# Altium PCB PCB2.PcbDoc
Units mil, origin at the board's own origin, x right, y up, seen from the top; angles counter-clockwise.
Board outline 2790.03 x 2725.03 mil, 2 copper layers (Top Layer, Bottom Layer); 12 components, 11 nets, 61 pads, 0 vias.
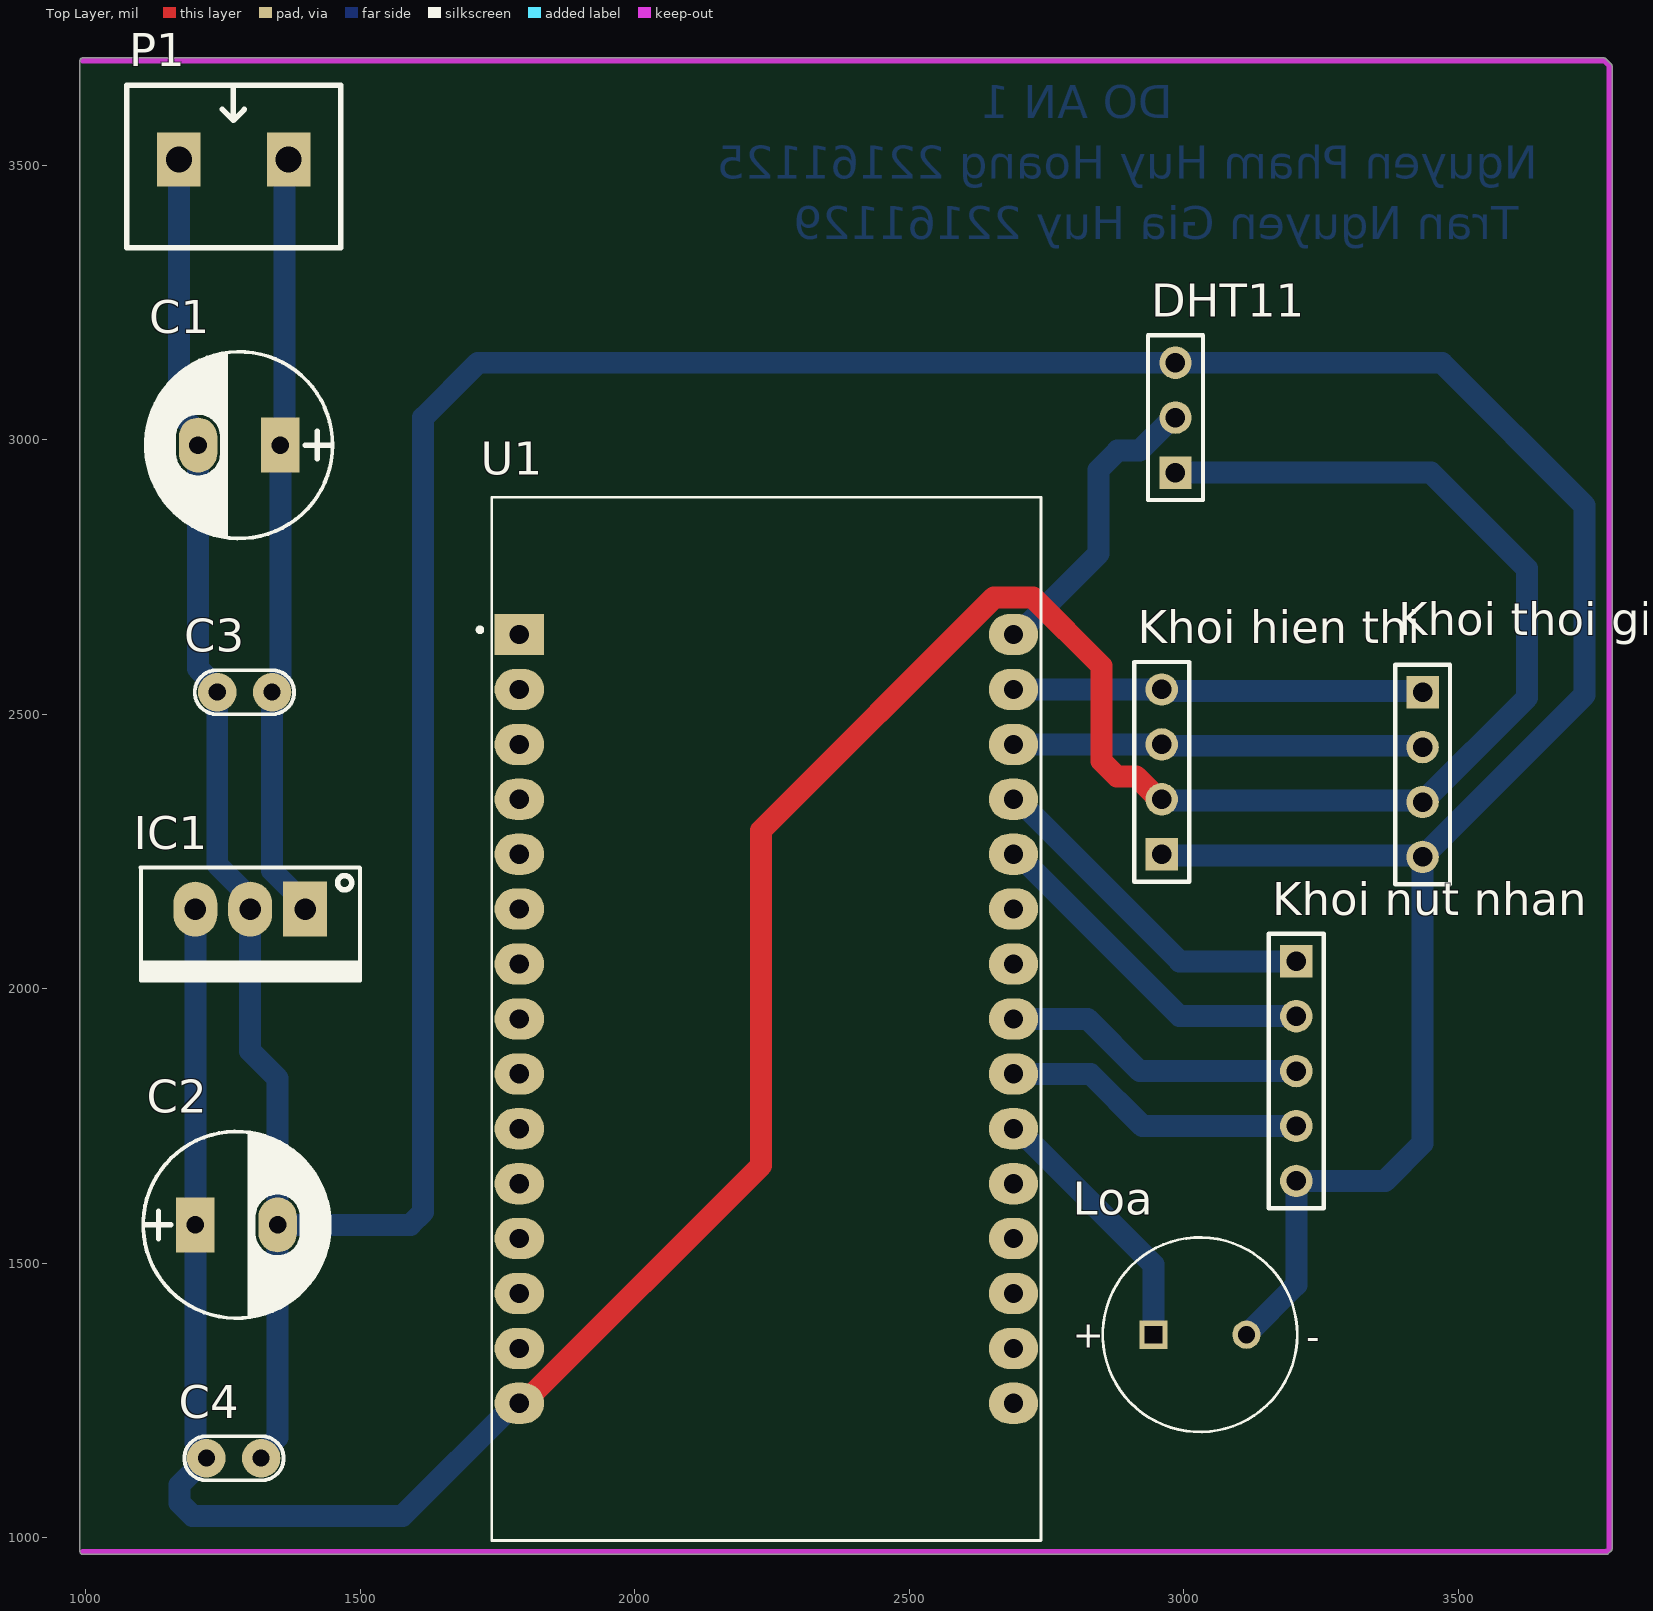
[diagram p0: Top Layer view]
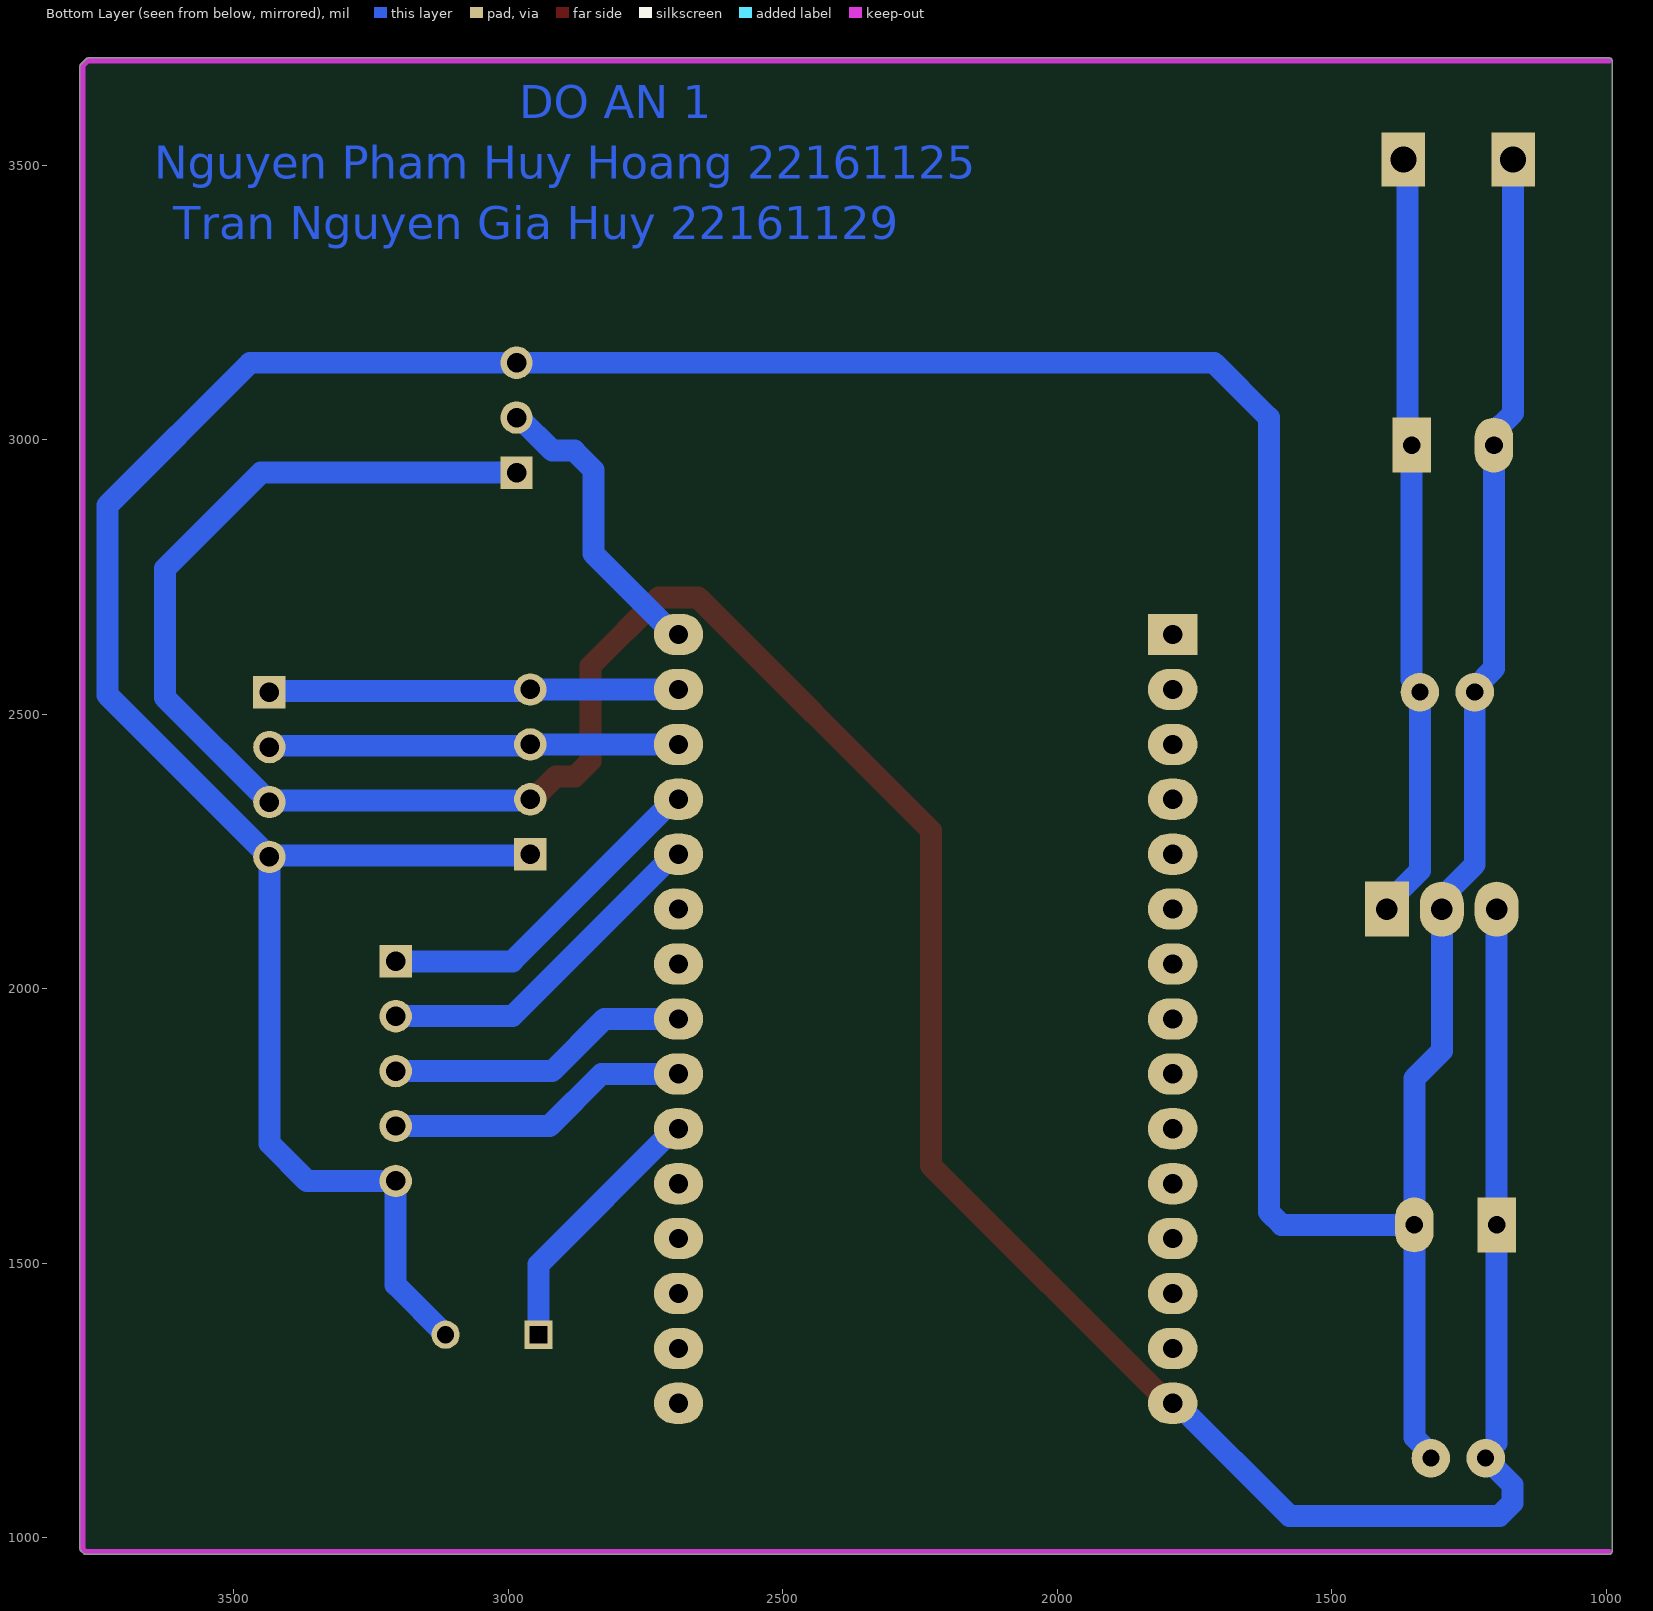
[diagram p1: Bottom Layer view, seen from below]
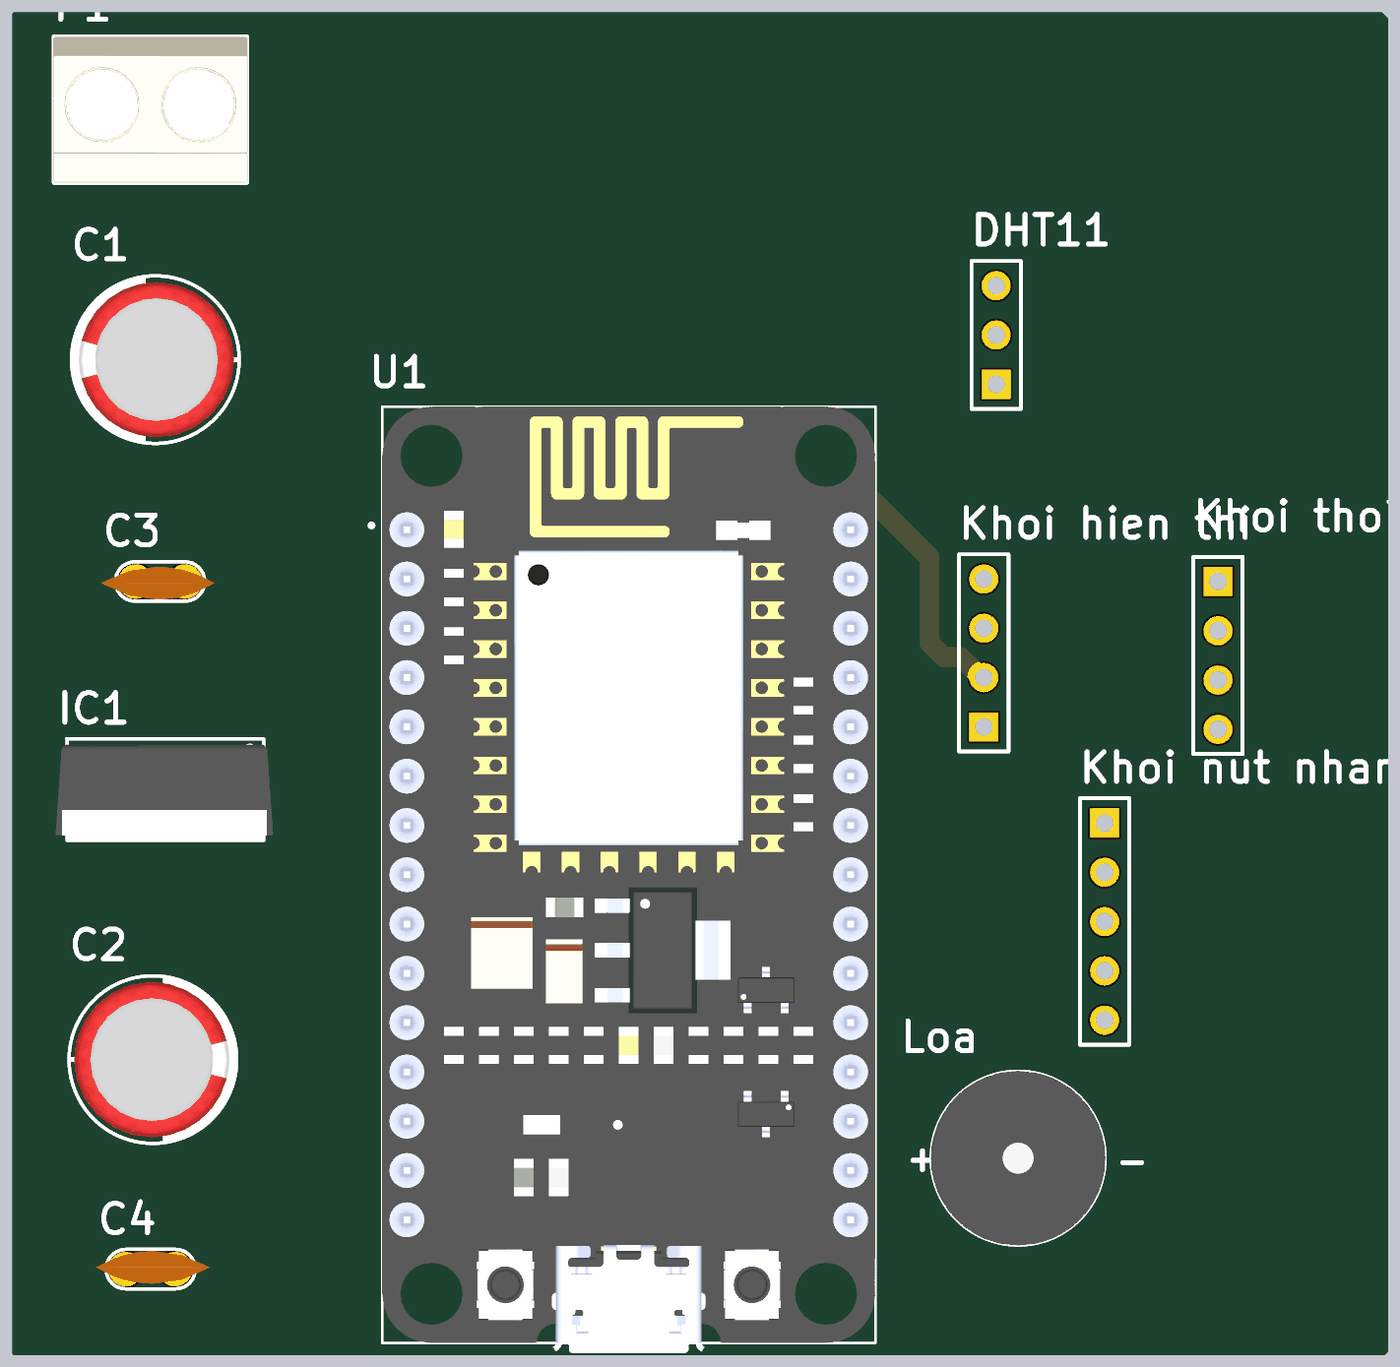
[diagram p2: 3D render of the assembled board from above, using the file's embedded part models]

## Layer stack, top to bottom
Top Solder: solder mask 0.4, Solder Resist, Dk 3.5
Top Layer: signal copper 1.4
Dielectric 1: dielectric 12.6, FR-4, Dk 4.8
Bottom Layer: signal copper 1.4
Bottom Solder: solder mask 0.4, Solder Resist, Dk 3.5

## Board outline
989.99,975 989.99,3690 cw(c995,3690) 995,3695.01 3765,3695.01 cw(c3765,3690) 3768.56,3693.53 3778.55,3683.55 cw(c3775.03,3680.01) 3780.01,3680 3780.01,980 cw(c3775,980) 3778.53,976.44 3773.55,971.45 cw(c3770.01,974.97) 3770,969.99 995,969.99 cw(c995,975)

## Design rules (kind name [scope] priority, off if disabled: settings)
Clearance [All] p1: gap=10 ignorepadtopadclearanceinfootprint=FALSE except(0: Arc-Hole Track-Hole SMDPad-Hole THPad-Hole Via-Hole Fill-Hole Poly-Hole Region-Hole Text-Hole)
PolygonConnect [All] p1: connectstyle=Relief reliefconductorwidth=10 reliefentries=4 polygonreliefangle="90 Angle" airgapwidth=10
RoutingVias [All] p1: holewidth=28 width=50 viastyle="Through Hole" minholewidth=28 minwidth=50 maxholewidth=28 maxwidth=50
SolderMaskExpansion [All] p1: expansion=4 istentingtop=FALSE
Width [All] p1: maxlimit=100 minlimit=10 preferedwidth=10
30 further rules are at their usual default settings.

## Components (designator, comment, footprint, x,y, rotation, side; value= is the part's Value field where it differs from the comment)
C1 "100uF/25V" CP1.5/3.4 1355,2990 r180 top value=100uF/35V/50V
C2 "47uF/16V" CP1.5/3.4 1200,1570 r0 top value=100uF/35V/50V
C3 "104" CN1 1340,2540 r180 top value=100pF
C4 "104" CN1 1220,1145 r0 top value=100pF
DHT11 "Header 3" HDR1X3 2985,2940 r90 top
IC1 "LM7805" QTO-220 1400,2145 r180 top
"Khoi hien thi" "Header 4" HDR1X4 2960,2245 r90 top
"Khoi nut nhan" "Header 5" HDR1X5 3205,2050 r270 top
"Khoi thoi gian thuc" "Header 4" HDR1X4 3435,2540 r270 top
Loa "Buzzer" Buzzer-9MM 3029.65,1370 r0 top
P1 "Header 2 - M" "Medium - Header 2" 1270,3510 r0 top
U1 "ESP8266-DevKit" ESP8266-DEVKIT 2240,1945 r0 top

## Footprints (in the part's own frame and the unit in brackets; to place one, negate y for a bottom-side part, rotate by r counter-clockwise, add the part's x,y. Pads: shape width x height; smd on the part's side, far side on the other; paste and mask are expansions set on the pad)
Buzzer-9MM [mm] "9MM"
  rect 1.308x1.308 hole 0.8 square: 1(-2.15,0)
  round 1.308 hole 0.8: 2(2.15,0)
  silkscreen extent -4.5,-4.5 4.5,4.5, body extent -4.5,-4.5 4.5,4.5, height 4.5
CN1 [mil]
  round 70 hole 31: 1(0,0) 2(100,0)
  silkscreen extent -40,-40 141,40, body extent -60,-30 170,37, height 265
CP1.5/3.4 [mil] "Tu hoa 220->470uF,16V, 470uF/16V,25V"
  rect 70x100 hole 32: 1(0,0)
  oval 70x100 hole 32: 2(150,0)
  silkscreen extent -95,-170 245,170, body extent -85,-157 230,157, height 446
ESP8266-DEVKIT [mil]
  rect 90x75 hole 35: 1(-450,700)
  oval 90x75 hole 35: 2(-450,600) 3(-450,500) 4(-450,400) 5(-450,300) 6(-450,200) 7(-450,100) 8(-450,0) 9(-450,-100) 10(-450,-200) 11(-450,-300) 12(-450,-400) 13(-450,-500) 14(-450,-600) 15(-450,-700) 16(450,-700) 17(450,-600) 18(450,-500) 19(450,-400) 20(450,-300) 21(450,-200) 22(450,-100) 23(450,0) 24(450,100) 25(450,200) 26(450,300) 27(450,400) 28(450,500) 29(450,600) 30(450,700)
  silkscreen extent -526,-950 500,950, body extent -500,-970 500,950, height 276
HDR1X3 [mm] "Connector; Header; 3 Position"
  rect 1.5x1.5 hole 0.9: 1(0,0)
  round 1.5 hole 0.9: 2(2.54,0) 3(5.08,0)
  silkscreen extent -1.27,-1.27 6.35,1.27, body extent -1.27,-1.27 6.35,1.27, height 7
HDR1X4 [mm] "Connector; Header; 4 Position"
  rect 1.5x1.5 hole 0.9: 1(0,0)
  round 1.5 hole 0.9: 2(2.54,0) 3(5.08,0) 4(7.62,0)
  silkscreen extent -1.27,-1.27 8.89,1.27, body extent -1.27,-1.27 8.89,1.27, height 7
HDR1X5 [mm] "Connector; Header; 5 Position"
  rect 1.5x1.5 hole 0.9: 1(0,0)
  round 1.5 hole 0.9: 2(2.54,0) 3(5.08,0) 4(7.62,0) 5(10.16,0)
  silkscreen extent -1.27,-1.27 11.43,1.27, body extent -1.27,-1.27 11.43,1.27, height 7
"Medium - Header 2" [mm]
  rect 2x2.5 hole 1.2: 1(-2.54,0) 2(2.54,0)
  silkscreen extent -4.95,-4.08 4.95,3.43, body extent -5,-4.07 5,3.43, height 10
QTO-220 [mil] "TO-220 - 1-2-3"
  rect 80x100 hole 39: 1(0,0)
  oval 80x100 hole 39: 2(100,0) 3(200,0)
  silkscreen extent -100,-76 300,130, body extent -119,-64 322,121, height 755

## Part data
C1 C2: library part CP3, "Cap 100uF/35V - 470uF/16V", Description 1="1000uF/6,3V - 470uF/16V - 330uF - 25V", Description 2="220uF/35V - 100uF/50V - 63V - 4,7uF/200V", Description 3="22uF => 33uF100V - 3,3uF => 4,7uF/250V", Description 4="2,2uF =>3,3uF/350 - 2,2uF/400V - 1uF/450V"
C3 C4: library part CN1, "Cap np  1pF - 472pF"
DHT11: "Header, 3-Pin", LatestRevisionDate=17-Jul-2002, LatestRevisionNote="Re-released for DXP Platform.", Publisher="Altium Limited"
IC1: library part LM78xx, "On ap +, from + 5 to + 24VDC"
"Khoi hien thi" "Khoi thoi gian thuc": "Header, 4-Pin", LatestRevisionDate=17-Jul-2002, LatestRevisionNote="Re-released for DXP Platform.", Publisher="Altium Limited"
"Khoi nut nhan": "Header, 5-Pin", LatestRevisionDate=17-Jul-2002, LatestRevisionNote="Re-released for DXP Platform.", Publisher="Altium Limited"
Loa: Package=None, Availability=Unavailable, MP=CST-951AP, Price=None
P1: "Header, 2-Pin, Medium", LatestRevisionDate=17-Jul-2002, LatestRevisionNote="Re-released for DXP Platform.", Publisher="Altium Limited"
U1: "NodeMcu Lua ESP8266 WIFI Internet of Things Network Development Module Board", Package=None, Availability="Not in stock", Check_prices=https://www.snapeda.com/parts/ZC563900/YKS/view-part/?ref=eda, MF=YKS, MP=ZC563900, Price=None, SnapEDA_Link=https://www.snapeda.com/parts/ZC563900/YKS/view-part/?ref=snap

## Nets (pads, with @x,y where several pads share a name; then routed paths per layer and width w, separated by ;. In a path a pad name is that pad's centre, name@x,y a point inside that pad or via, vN(x,y) a via of type N, cw(c..) or ccw(c..) an arc to the next point about the centre after c; other vN are vias at no path point)
+5: "Khoi hien thi.2" "Khoi thoi gian thuc.3" C2.1 C4.1 DHT11.1 IC1.3 U1.15 | length 5905.2
  Top Layer w40: U1.15 1797.5,1245 2230.6,1678.1 2230.6,2288.56 2654.54,2712.5 2725.46,2712.5 2850,2587.96 2850,2415 2878.28,2386.72 2913.13,2386.72 2954.84,2345 2960,2345
  Bottom Layer w40: IC1.3 C2.1 1200,1173.12 1220,1153.12 C4.1 1171.57,1096.57 1171.57,1063.43 1195,1040 1577.5,1040 1782.5,1245 U1.15 ; 2960,2345 2962.5,2342.5 3432.5,2342.5 3435,2340 3625,2530 3625,2765 3450,2940 DHT11.1
+12: C1.1 C3.1 IC1.1 P1.2 | length 1372.9
  Bottom Layer w40: C3.1 1340,2215 1400,2155 IC1.1 ; C3.1@1355,2563.12 C1.1 1362.5,2997.5 1362.5,3502.5 P1.2
Buzzer: Loa.1 U1.21 | length 485
  Bottom Layer w40: U1.21 2697.5,1745 2945,1497.5 Loa.1
Dat_bao_thuc: "Khoi nut nhan.3" U1.23 | length 554.4
  Bottom Layer w40: U1.23 2825,1945 2920,1850 3205,1850
DHT11: DHT11.2 U1.30 | length 547.9
  Bottom Layer w40: U1.30 2697.5,2645 2845,2792.5 2845,2945 2879.79,2979.79 2919.63,2979.79 2979.84,3040 DHT11.2
Down: "Khoi nut nhan.2" U1.26 | length 637.2
  Bottom Layer w40: U1.26 2697.5,2245 2992.5,1950 3205,1950
GND: "Khoi hien thi.1" "Khoi nut nhan.5" "Khoi thoi gian thuc.4" C1.2 C2.2 C3.2 C4.2 DHT11.3 IC1.2 Loa.2 P1.1 | length 8793.7
  Bottom Layer w40: P1.1 1170,3048.12 1205,3013.12 C1.2 1205,2583.12 1240,2548.12 C3.2 1240,2225.82 1300,2165.82 IC1.2 1300,1886.52 1350,1836.52 C2.2@1350,1576.14 ; C4.2 1320,1153.12 1350,1183.12 C2.2 ; C2.2@1363.86,1590 C2.2@1350,1576.14 ; 2960,2245 2962.5,2242.5 3432.5,2242.5 3435,2240 ; Loa.2 3205,1460.71 3205,1650 3366.57,1650 3435,1718.43 3435,2240 ; C2.2 1591.57,1570 1615,1593.43 1615,3040 1715,3140 DHT11.3 3470,3140 3730,2880 3730,2535 3435,2240 ; C2.2 C2.2@1350,1576.14
Mode: "Khoi nut nhan.4" U1.22 | length 554.4
  Bottom Layer w40: U1.22 2830,1845 2925,1750 3205,1750
SCL: "Khoi hien thi.4" "Khoi thoi gian thuc.1" U1.29 | length 747.1
  Bottom Layer w40: U1.29 2960,2545 2962.5,2542.5 3432.5,2542.5 3435,2540
SDA: "Khoi hien thi.3" "Khoi thoi gian thuc.2" U1.28 | length 747.1
  Bottom Layer w40: U1.28 2960,2445 2962.5,2442.5 3432.5,2442.5 3435,2440
Up: "Khoi nut nhan.1" U1.27 | length 637.2
  Bottom Layer w40: U1.27 2697.5,2345 2992.5,2050 3205,2050
pads on no net: U1.1 U1.2 U1.3 U1.4 U1.5 U1.6 U1.7 U1.8 U1.9 U1.10 U1.11 U1.12 U1.13 U1.14 U1.16 U1.17 U1.18 U1.19 U1.20 U1.24 U1.25

## Keep-outs
Keep-Out Layer:
  lines w10: 995,975 3770,975 3775,980 3775,3680 3765,3690 995,3690

## Other copper
Bottom Layer:
  text "DO AN 1" at 2980,3585 h60
  text "Nguyen Pham Huy Hoang 22161125" at 3645,3474.99 h60
  text "Tran Nguyen Gia Huy 22161129" at 3610,3364.99 h60

## Text inside footprints (layer, text, board x,y; h text height)
Loa: Top Overlay "+" at 2797.96,1346.32 h50.13; Top Overlay "-" at 3223.55,1341.31 h50.14